# Altium PCB ArduhoopPCB.PcbDoc
Units mm, origin at the board's own origin, x right, y up, seen from the top; angles counter-clockwise.
Board outline 30 x 25.4 mm, 4 copper layers (L1, L2 (GND), L3, L4), stack 0.844 mm thick; 52 components, 41 nets, 229 pads, 70 vias.
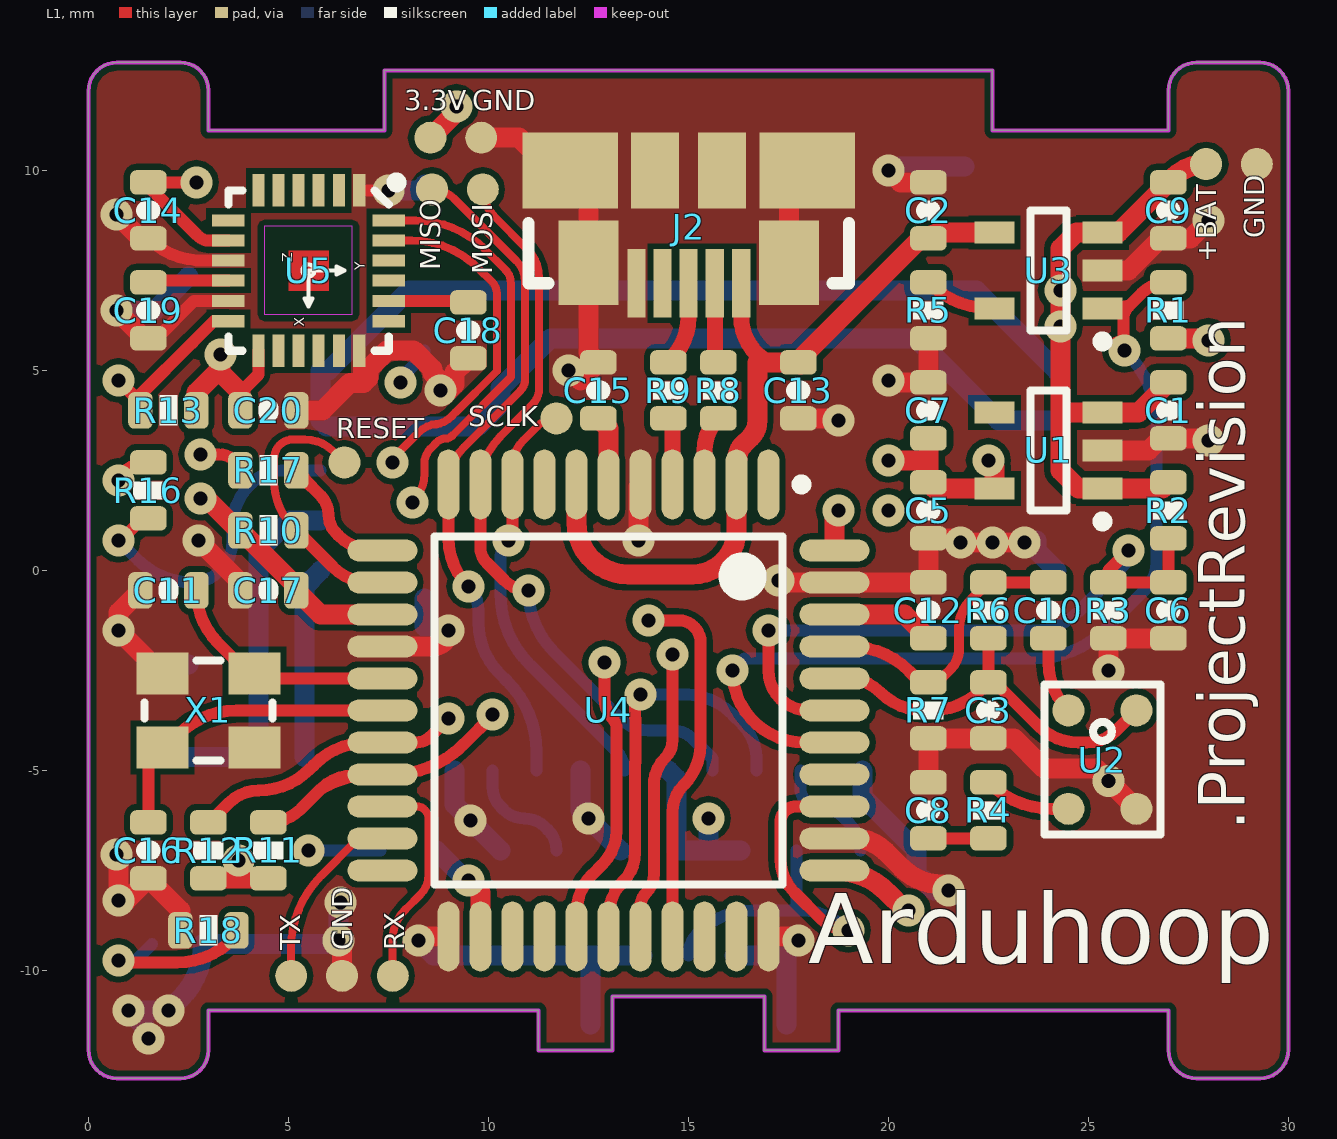
[diagram p0: L1 view]
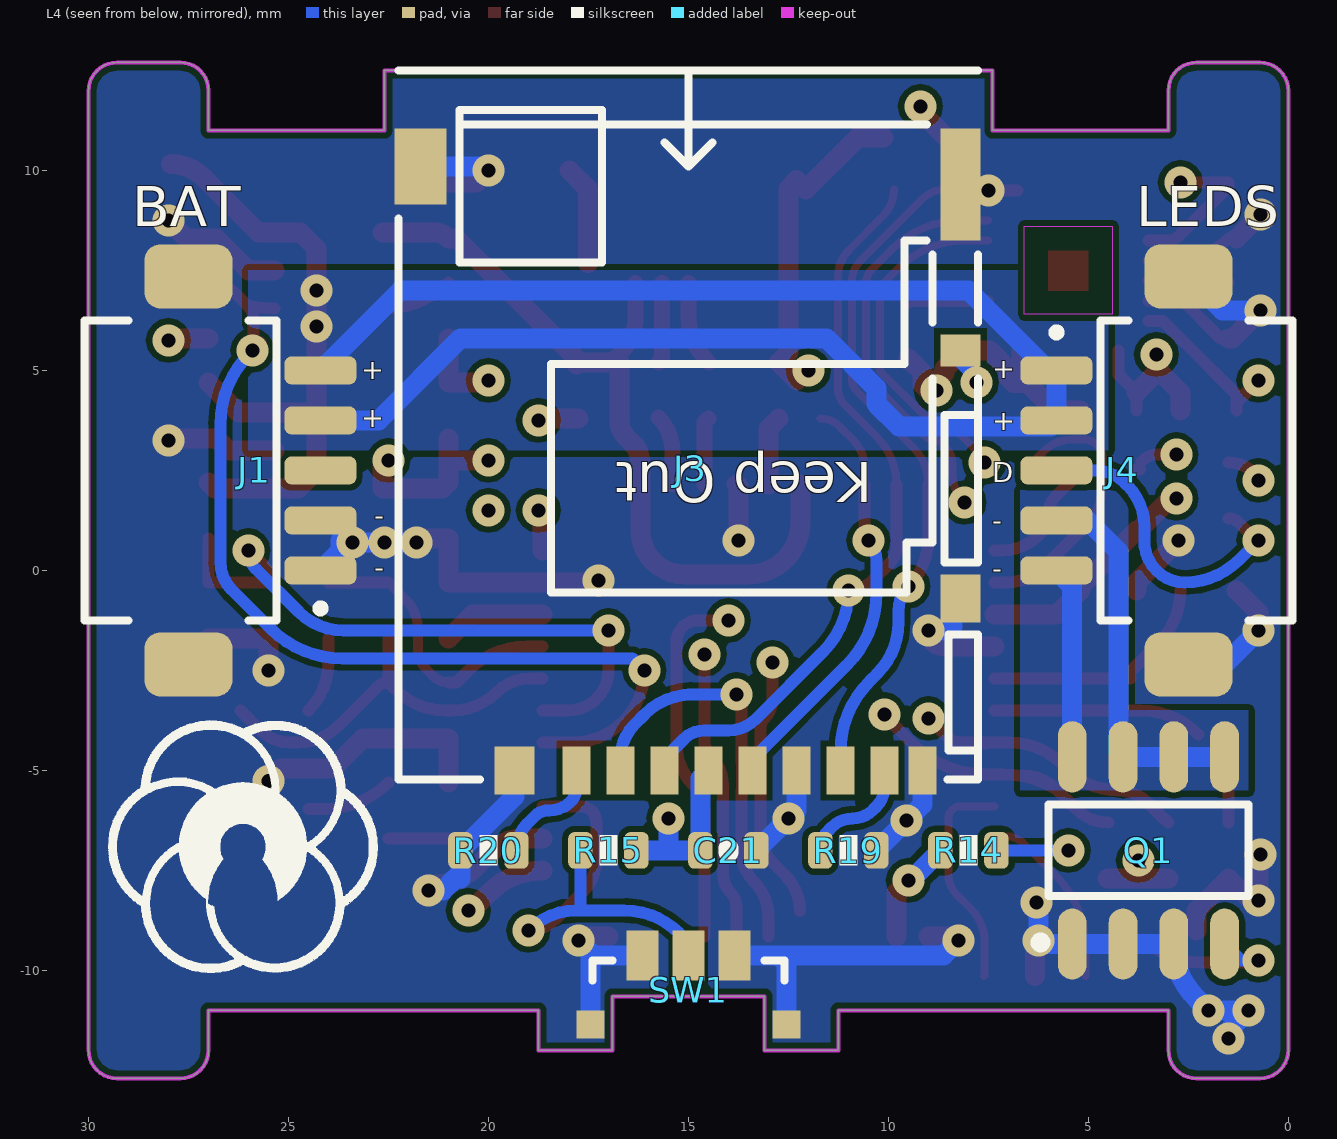
[diagram p1: L4 view, seen from below]
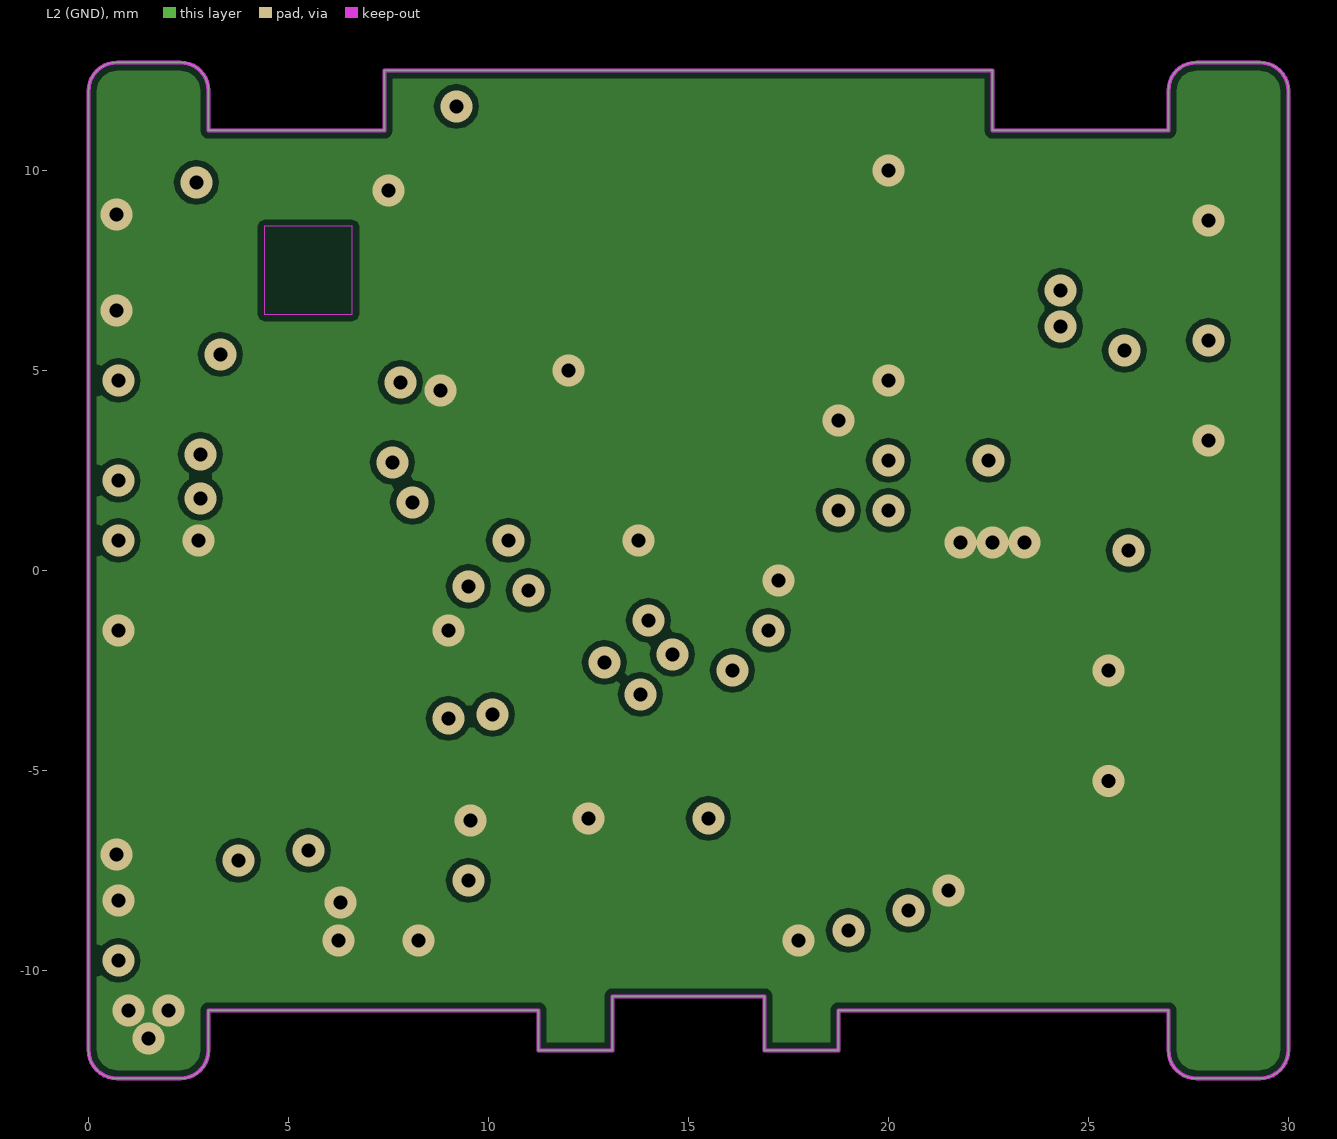
[diagram p2: L2 (GND)]
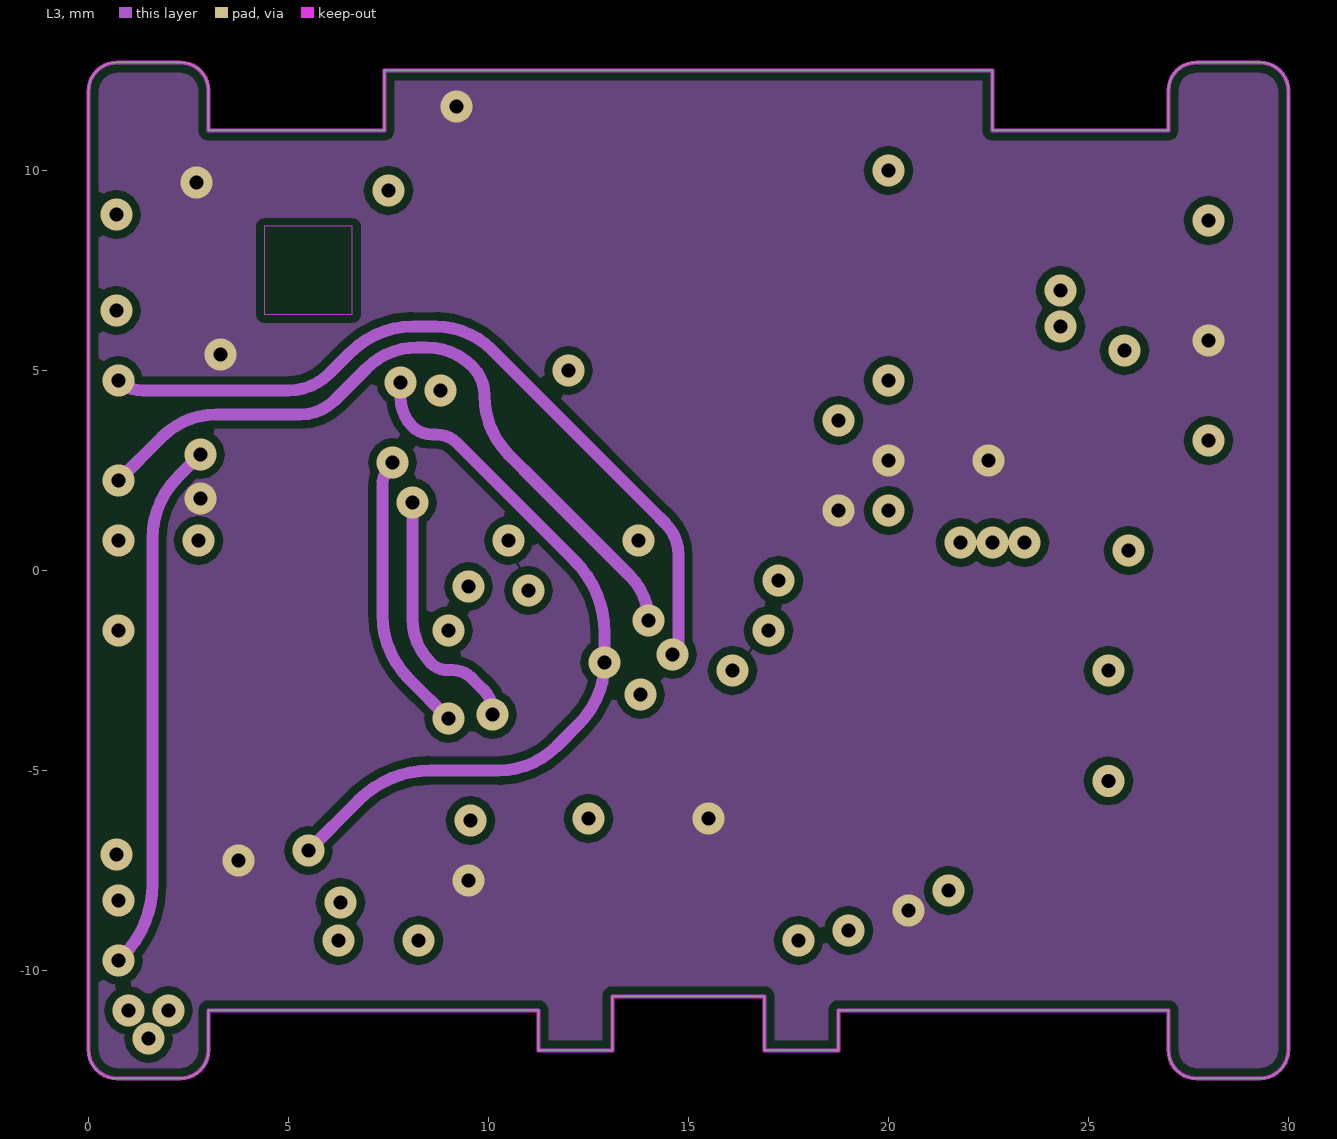
[diagram p3: L3]
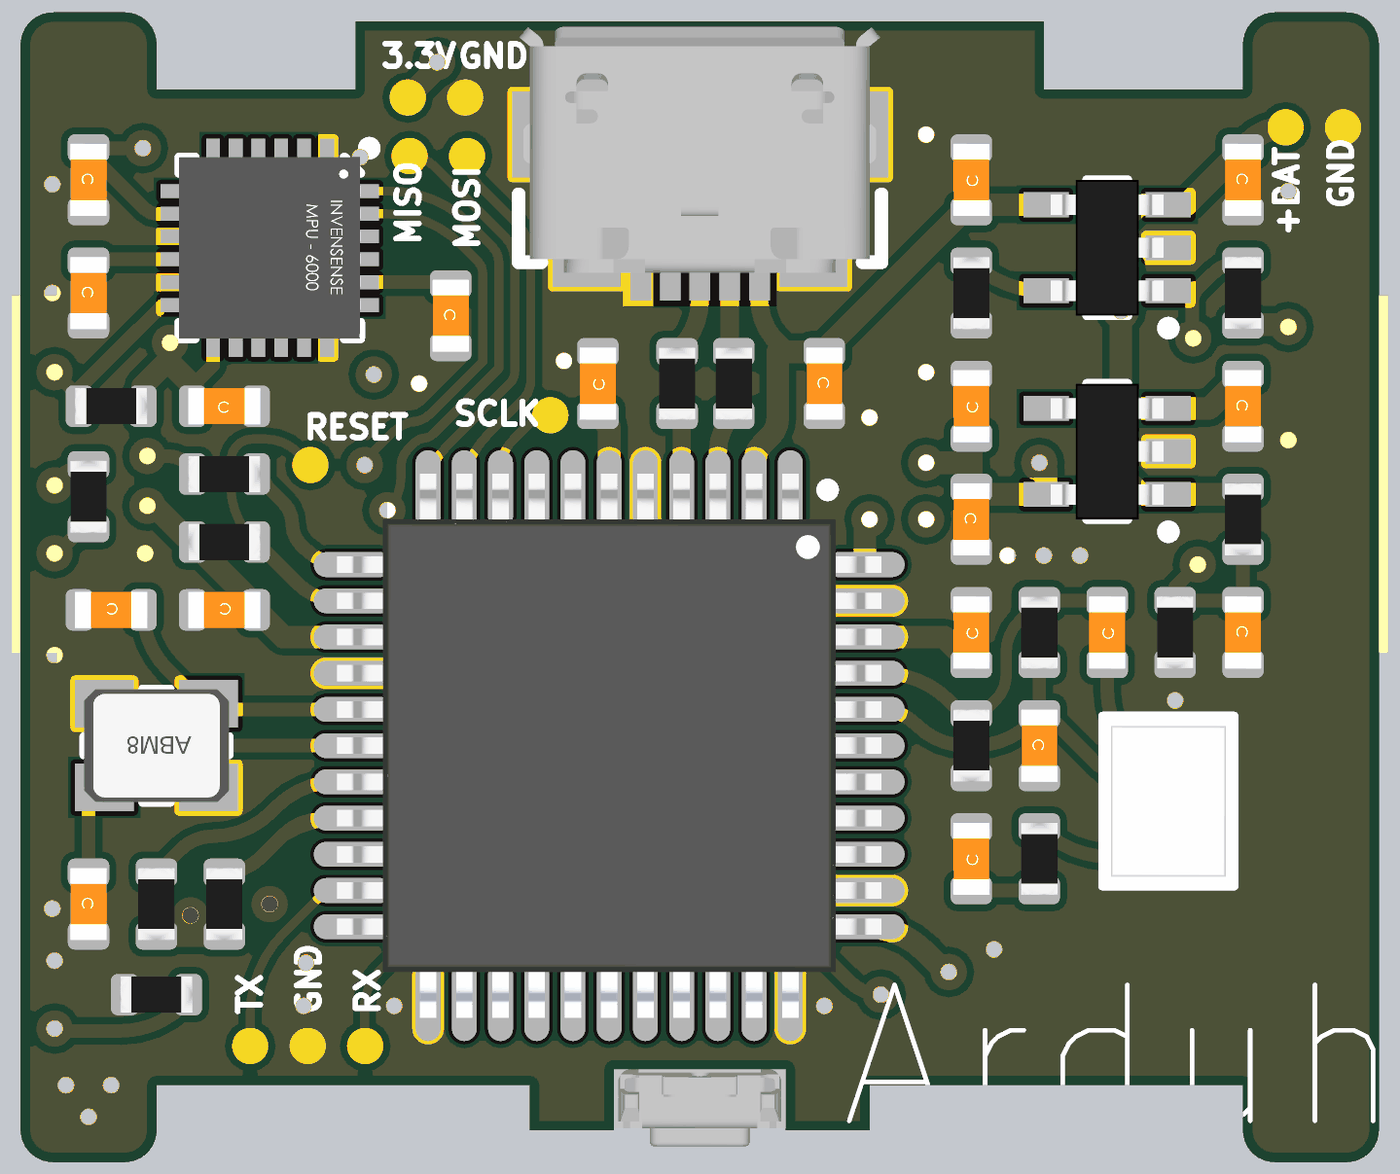
[diagram p4: 3D render of the assembled board from above, using the file's embedded part models]
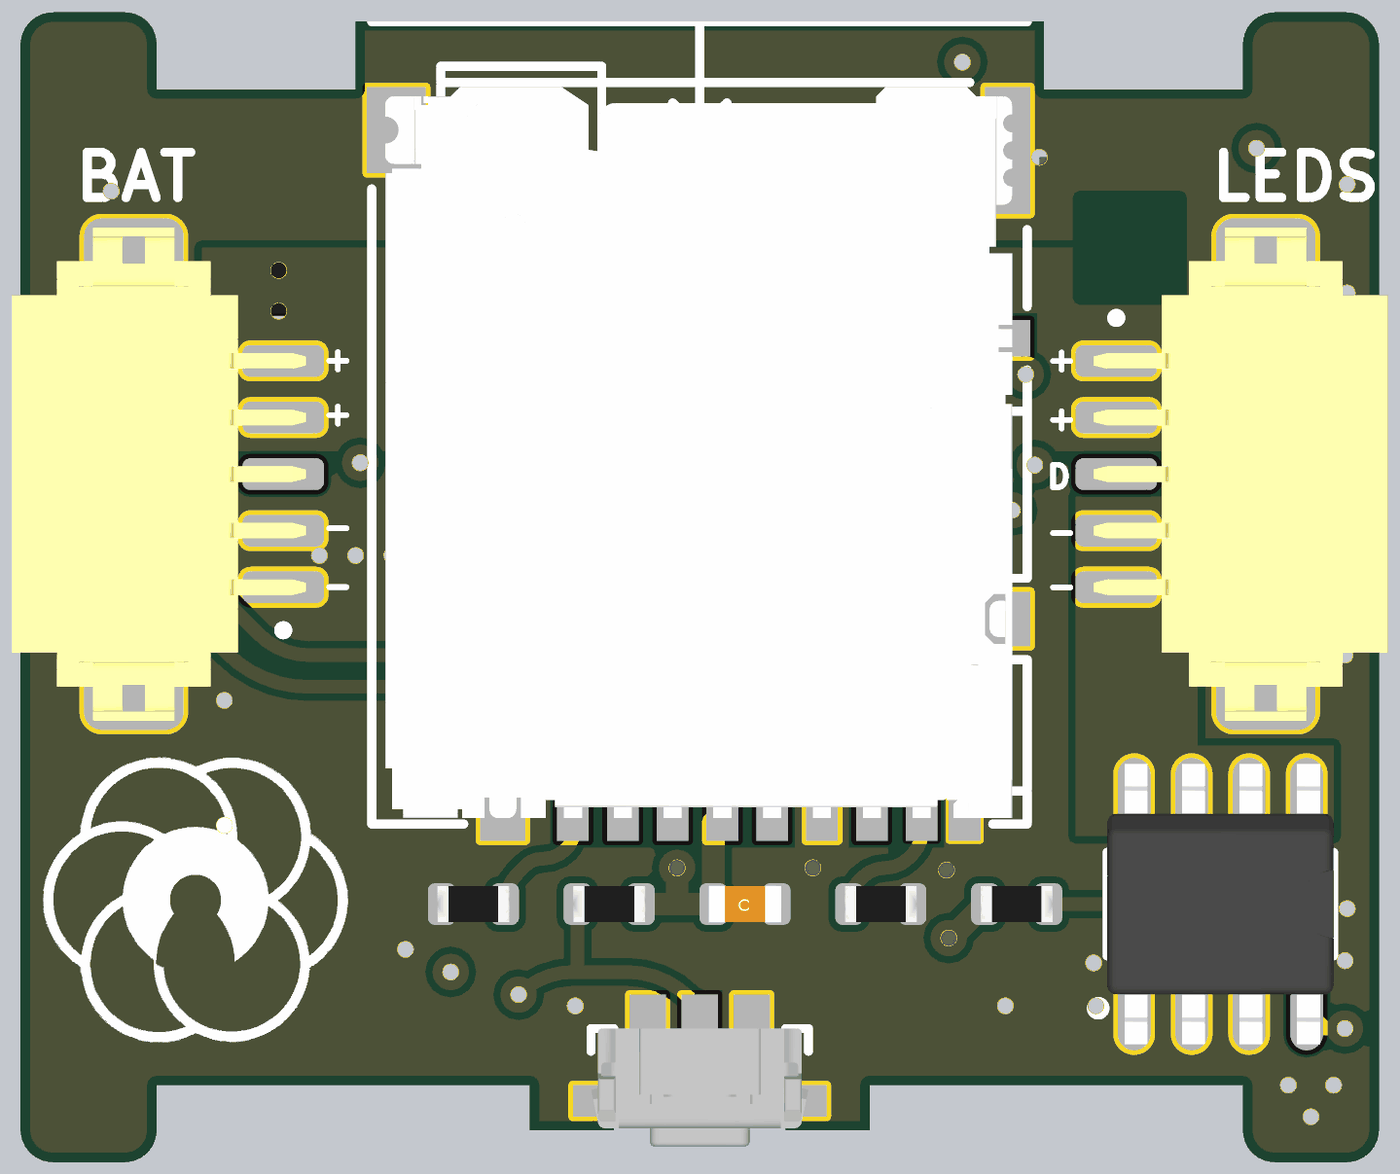
[diagram p5: 3D render of the assembled board from below, using the file's embedded part models]

## Layer stack, top to bottom
Top Solder: solder mask 0.0102, Solder Resist, Dk 3.5
L1: signal copper 0.0356
Dielectric 1: core 0.32, FR-4, Dk 4.8
L2 (GND): signal copper 0.036
Dielectric 3: prepreg 0.127, Dk 4.2
L3: signal copper 0.036
Dielectric 4: core 0.254, Dk 4.2
L4: signal copper 0.0356
Bottom Solder: solder mask 0.0102, Solder Resist, Dk 3.5

## Board outline
0,-11.985 ccw(c0.715,-11.985) 0.715,-12.7 2.3,-12.7 ccw(c2.3,-12) 3,-12 3,-11 11.25,-11 11.25,-12 13.1,-12 13.1,-10.65 16.9,-10.65 16.9,-12 18.75,-12 18.75,-11 27,-11 27,-12 ccw(c27.7,-12) 27.7,-12.7 29.285,-12.7 ccw(c29.285,-11.985) 30,-11.985 30,11.985 ccw(c29.285,11.985) 29.285,12.7 27.7,12.7 ccw(c27.7,12) 27,12 27,11 22.6,11 22.6,12.5 7.4,12.5 7.4,11 3,11 3,12 ccw(c2.3,12) 2.3,12.7 0.715,12.7 ccw(c0.715,11.985) 0,11.985

## Design rules (kind name [scope] priority, off if disabled: settings)
AssemblyTestPointUsage [InNetClass('TP')] p1:
AssemblyTestpoint [All] p1: testpointundercomponent=TRUE minsize=0.8 maxsize=0.8 preferedsize=0.8 minholesize=0 maxholesize=0 preferedholesize=0 testpointgrid=0.025 usegrid=FALSE gridtolerance=0 allowsidetop=TRUE minspacing=1.27
Clearance Clearance_Button [HasFootprint('EVPAEJB2A')] p1: gap=0.1
Clearance Clearance_L2L3 [OnLayer('L2 (GND)')   or OnLayer('L3')] p2: gap=0.203
Clearance [All] p3: gap=0.152
DiffPairsRouting [All] p1: maxlimit=0.254 minlimit=0.254 mostfreqgap=0.254 toplayer_minwidth=0.4 toplayer_maxwidth=0.4 toplayer_prefwidth=0.4 midlayer1_minwidth=0.4 midlayer1_maxwidth=0.4 midlayer1_prefwidth=0.4 midlayer2_minwidth=0.4 midlayer2_maxwidth=0.4 midlayer2_prefwidth=0.4 bottomlayer_minwidth=0.4 bottomlayer_maxwidth=0.4 bottomlayer_prefwidth=0.4 maxuncoupledlength=3
FabricationTestpoint [not All] p1: side=1 testpointundercomponent=TRUE minsize=0.1 maxsize=2.54 preferedsize=1.524 minholesize=0 maxholesize=1.016 preferedholesize=0.813 testpointgrid=0.025 allowsidetop=TRUE usegrid=FALSE gridtolerance=0
HoleSize [All] p1: absolutevalues=TRUE maxlimit=2.54 minlimit=0.33 maxpercent=80.000 minpercent=20.000
MinimumSolderMaskSliver [All] p1: minsoldermaskwidth=0.1
PlaneConnect [All] p1: planeconnectstyle=Direct reliefexpansion=0.508 reliefentries=4 reliefconductorwidth=0.254 reliefairgap=0.254
PolygonConnect [All] p1: connectstyle=Direct reliefconductorwidth=0.254 reliefentries=4 polygonreliefangle="90 Angle" airgapwidth=0.254
RoomDefinition Room_MPU6050 [HasFootprint('QFN24_4X4X0.9mm')] p1: confinementstyle=ConfineIn formatcopy=TRUE lockcomponents=FALSE outline 1,10.2 18.6,10.2 18.6,4.2 1,4.2
RoutingVias [All] p1: holewidth=0.35 width=0.8 viastyle="Through Hole" minholewidth=0.35 minwidth=0.8 maxholewidth=0.35 maxwidth=0.8
SilkToSilkClearance [All] p1: silktosilkclearance=0.152
SilkToSolderMaskClearance [IsPad] p1: minsilkscreentomaskgap=0.098 clearancetoexposedcopper=TRUE
SolderMaskExpansion [All] p1: expansion=0.102
Width Width_IMU6050 [TouchesRoom('Room_MPU6050') and (InNet('+3.3V')or InNet('+VBUS')or InNet('GND'))] p1: maxlimit=0.5 minlimit=0.3 preferedwidth=0.3
Width Width_PWR [InNet('+3.3V') or InNet('+BAT')or  InNet('+UCAP')or InNet('+AREF') or InNet('+VBUS') or InNet('GND') or InNet('LED_GND')] p2: maxlimit=0.5 minlimit=0.5 preferedwidth=0.5
Width [All] p3: maxlimit=0.3 minlimit=0.152 preferedwidth=0.3
21 further rules are at their usual default settings.

## Classes and differential pairs
net class SPI: CS MISO MOSI SCLK
net class USB: D_N D_P
net class AVR_SPI: +3.3V GND MISO MOSI RESET SCLK
net class TP: +3.3V +BAT GND MISO MOSI RESET RX SCLK TX
differential pair D1: +D1_P -D1_N
differential pair D: +D_P -D_N

## Components (designator, comment, footprint, x,y, rotation, side; value= is the part's Value field where it differs from the comment)
C1 "CAP" C0603 27,4 r270 top locked
C2 "CAP" C0603 21,9 r90 top locked
C3 "CAP" C0603 22.5,-3.5 r270 top locked
C5 "CAP" C0603 21,1.5 r270 top locked
C6 "CAP" C0603 27,-1 r270 top locked
C7 "CAP" C0603 21,4 r90 top locked
C8 "CAP" C0603 21,-6 r90 top locked
C9 "CAP" C0603 27,9 r270 top locked
C10 "CAP" C0603 24,-1 r90 top locked
C11 "CAP" C0603 2,-0.5 r180 top locked
C12 "CAP" C0603 21,-1 r90 top locked
C13 "CAP" C0603 17.75,4.5 r270 top
C14 "CAP" C0603 1.5,9 r270 top locked
C15 "CAP" C0603 12.75,4.5 r90 top locked
C16 "CAP" C0603 1.5,-7 r270 top locked
C17 "CAP" C0603 4.5,-0.5 r180 top locked
C18 "CAP" C0603 9.5,6 r270 top locked
C19 "CAP" C0603 1.5,6.5 r270 top locked
C20 "CAP" C0603 4.5,4 r0 top locked
C21 "CAP" C0603 14,-7 r180 bottom locked
J1 "HDR_TAB_1x5" DF13A-5P-1.25H 27.5,2.5 r90 bottom locked
J2 "Molex 47346-0001" "Molex 47346-0001" 15,10 r270 top locked
J3 "DM3AT-SF-PEJM5" USD_DM3AT 17.8,-5 r90 bottom locked
J4 "HDR_TAB_1x5" DF13A-5P-1.25H 2.5,2.5 r270 bottom locked
Q1 "MOSFET_N" SO-8 3.5,-7 r90 bottom locked
R1 "RES" R0603 27,6.5 r90 top locked
R2 "RES" R0603 27,1.5 r90 top locked
R3 "RES" R0603 25.5,-1 r90 top locked
R4 "RES" R0603 22.5,-6 r270 top locked
R5 "RES" R0603 21,6.5 r270 top locked
R6 "RES" R0603 22.5,-1 r270 top locked
R7 "RES" R0603 21,-3.5 r90 top locked
R8 "RES" R0603 15.75,4.5 r270 top
R9 "RES" R0603 14.5,4.5 r270 top
R10 "RES" R0603 4.5,1 r0 top locked
R11 "RES" R0603 4.5,-7 r90 top locked
R12 "RES" R0603 3,-7 r90 top locked
R13 "RES" R0603 2,4 r180 top locked
R14 "RES" R0603 8,-7 r0 bottom locked
R15 "RES" R0603 17,-7 r180 bottom locked
R16 "RES" R0603 1.5,2 r270 top locked
R17 "RES" R0603 4.5,2.5 r180 top locked
R18 "RES" R0603 3,-9 r180 top locked
R19 "RES" R0603 11,-7 r0 bottom locked
R20 "RES" R0603 20,-7 r180 bottom locked
SW1 "EVPAE" EVPAEJB2A 15,-10.25 r180 bottom locked
U1 "MIC5219" SOT-23-5 24,3 r180 top locked
U2 "SPU0414HR5H" SPU0414HR5H 24.5,-3.5 r0 top locked
U3 "MCP73832" SOT-23-5 24,7.5 r180 top locked
U4 "ATmega32U4-AU" ATMEL-TQFP44_ml 13,-3.5 r270 top locked
U5 "MPU6050" QFN24_4X4X0.9mm 5.5,7.5 r270 top locked
X1 "Crystal_4pin" SMD4_3.2x2.50mm_ABM8 3,-3.5 r180 top locked

## Footprints (in the part's own frame and the unit in brackets; to place one, negate y for a bottom-side part, rotate by r counter-clockwise, add the part's x,y. Pads: shape width x height; smd on the part's side, far side on the other; paste and mask are expansions set on the pad)
ATMEL-TQFP44_ml [mm] "Thin QFP, 44-Leads, Body 10x10mm, Pitch 0.8mm, IPC Medium Density"
  oval 1.75x0.55 smd paste+0 mask+0.075: 1(-5.65,4) 2(-5.65,3.2) 3(-5.65,2.4) 4(-5.65,1.6) 5(-5.65,0.8) 6(-5.65,0) 7(-5.65,-0.8) 8(-5.65,-1.6) 9(-5.65,-2.4) 10(-5.65,-3.2) 11(-5.65,-4) 23(5.65,-4) 24(5.65,-3.2) 25(5.65,-2.4) 26(5.65,-1.6) 27(5.65,-0.8) 28(5.65,0) 29(5.65,0.8) 30(5.65,1.6) 31(5.65,2.4) 32(5.65,3.2) 33(5.65,4)
  oval 0.55x1.75 smd paste+0 mask+0.075: 12(-4,-5.65) 13(-3.2,-5.65) 14(-2.4,-5.65) 15(-1.6,-5.65) 16(-0.8,-5.65) 17(0,-5.65) 18(0.8,-5.65) 19(1.6,-5.65) 20(2.4,-5.65) 21(3.2,-5.65) 22(4,-5.65) 34(4,5.65) 35(3.2,5.65) 36(2.4,5.65) 37(1.6,5.65) 38(0.8,5.65) 39(0,5.65) 40(-0.8,5.65) 41(-1.6,5.65) 42(-2.4,5.65) 43(-3.2,5.65) 44(-4,5.65)
  silkscreen extent -5.77,-4.35 4.35,4.95, body extent -6.01,-6.01 6.01,6.01, height 1.35
C0603 [mil]
  rrect50% 24x36 smd mask+0: 1(-27.56,0) 2(27.56,0)
  silkscreen extent 0,-2 0,2, body extent -31,-16 32,16, height 34
DF13A-5P-1.25H [mm]
  rrect50% 0.7x1.8 smd paste+0: 1(-2.5,-3.3) 2(-1.25,-3.3) 3(0,-3.3) 4(1.25,-3.3) 5(2.5,-3.3)
  rrect50% 1.6x2.2 smd: TAB(-4.85,0) TAB(4.85,0)
  silkscreen extent -3.75,-3.4 3.75,2.6, body extent -5.45,-3.8 5.45,2.7, height 3.6
EVPAEJB2A [mm]
  rect 0.7x0.7 smd: 0(-2.45,-1.1) 0(2.45,-1.1)
  rect 0.8x1.25 smd: 1(-1.15,0.625) 2(0,0.625) 3(1.15,0.625)
  silkscreen extent -2.4,0 2.4,0.5, body extent -2.4,-2.1 2.4,0.5, height 0.95
"Molex 47346-0001" [mil]
  rect 67x18 smd: D+(111,0) D-(111,26) GND(111,-51.18) ID(111,-25.59) VBUS(111,52)
  rect 75x94 smd: GND1(0,117) GND4(0,-116.14)
  rect 83x59 smd: GND2(91,99) GND3(91,-98.43)
  rect 75x47 smd: GND5(0,-32.97) GND6(0,33)
  silkscreen extent 52,-157 111,158, body extent -94,-157 120,157, height 107
QFN24_4X4X0.9mm [mil] "QFN, 24-Leads, Body 3.00x3.00mm, Pitch 0.40mm, Thermal Pad 1.54x1.70mm, IPC High Density"
  rect 32x12 smd: 1(-78.74,50) 2(-78.74,30) 3(-78.74,10) 4(-78.74,-9.84) 5(-78.74,-29.53) 6(-78.74,-49.21) 13(79,-49.21) 14(79,-29.53) 15(79,-9.84) 16(79,10) 17(79,30) 18(79,50)
  rect 12x32 smd: 7(-49.21,-78.74) 8(-29.53,-78.74) 9(-9.84,-78.74) 10(10,-78.74) 11(30,-78.74) 12(50,-78.74) 19(50,79) 20(30,79) 21(10,79) 22(-9.84,79) 23(-29.53,79) 24(-49.21,79)
  L1 region: -19.69,-19.68 20,-19.68 20,20 -19.69,20
  Keep-Out Layer region: -43.3,-43.31 43.31,-43.31 43.31,43.31 -43.3,43.31
  silkscreen extent -92,-79 79,92, body extent -79,-79 79,79, height 35
R0603 [mil]
  rrect50% 24x36 smd mask+0: 1(-27.56,0) 2(27.56,0)
  silkscreen extent -9,-15 9,15, body extent -31,-16 32,16, height 18
SMD4_3.2x2.50mm_ABM8 [mm]
  rect 1.3x1.05 smd: 1(-1.15,-0.925) 2(1.15,-0.925) 3(1.15,0.925) 4(-1.15,0.925)
  silkscreen extent -1.6,-1.25 1.6,1.25, body extent -1.6,-1.24 1.6,1.24, height 0.8
SO-8 [mm] "SOIC, 8-Leads, Body 4.90x3.90mm, Pitch 1.27mm, IPC Medium Density"
  oval 1.78x0.72 smd: 1(-2.34,1.905) 2(-2.34,0.635) 3(-2.34,-0.635) 4(-2.34,-1.905) 5(2.34,-1.905) 6(2.34,-0.635) 7(2.34,0.635) 8(2.34,1.905)
  silkscreen extent -2.42,-2.5 1.14,2.83, body extent -3.1,-2.5 3.1,2.5, height 1.75
SOT-23-5 [mm] "SOT23, 5-Leads, Body 2.92x2.80mm, Pitch 0.95mm, IPC Medium Density"
  rect 1x0.55 smd paste+0: 1(-1.35,0.95) 2(-1.35,0) 3(-1.35,-0.95) 4(1.35,-0.95) 5(1.35,0.95)
  silkscreen extent -1.48,-1.5 0.45,1.9, body extent -1.25,-1.5 1.25,1.5, height 1.1
SPU0414HR5H [mm]
  round 0.8 smd paste+0: 1(1.7,0) 2(1.7,-2.46) 3(0,-2.46) 4(0,0)
  silkscreen extent -0.6,-3.1 2.3,0.65, body extent -0.62,-3.11 2.33,0.65, height 1.1
USD_DM3AT [mm]
  rect 1.2x0.7 smd: 1(0,0) 2(0,-1.1) 3(0,-2.2) 4(0,-3.3) 5(0,-4.4) 6(0,-5.5) 7(0,-6.6)
  rect 1.2x0.7 smd mask+0.07: 8(0,-7.7) 9(0,-8.65)
  rect 1.2x1 smd: 10(4.3,-9.6) 14(0,1.55)
  rect 0.8x1 smd: 11(10.5,-9.6)
  rect 2.8x1 smd: 12(14.65,-9.6)
  rect 1.9x1.3 smd: 13(15.1,3.9)
  silkscreen extent -0.23,-10.03 17.49,4.44, body extent -0.1,-9.7 16.05,4.15, height 1.68

## Part data
C1 C5 C9 C13 C15: library part C01293, "CAP CER 1UF 16V X7R 0603"
C2 C3 C6 C7 C8 C10 C12 C14 C17 C19 C20 C21: library part C01052, "CAP CER 0.1UF 16V X7R 0603"
C11 C16: library part C00144, "CAP CER 22PF 50V NP0 0603"
C18: library part C00648, "CAP CER 2200PF 50V X7R 0603"
J1 J4: library part J00022, "CONN HEADER 5POS 1.25MM R/A TIN"
J2: library part USB
J3: library part J00167, "CONN MICRO SD CARD PUSH-PUSH R/A"
Q1: library part Q000008, "MOSFET P-CH 30V 5.8A 8-SOIC"
R1 R5 R10 R11 R12 R13 R18: library part R00109, "RES SMD 2.2K OHM 1% 1/10W 0603"
R2 R3 R6 R7 R14 R15 R19 R20: library part R00189, "RES SMD 100K OHM 1% 1/10W 0603"
R4 R8 R9 R16 R17: library part R00015, "RES SMD 22 OHM 1% 1/10W 0603"
SW1: library part SW000001, "SWITCH TACTILE SPST-NO 0.02A 15V"
U1: library part PMIC000001, "IC REG LDO 3.3V 0.5A SOT23-5"
U2: library part P000005, "MIC MEMS ANALOG OMNI -22DB"
U3: library part P000002, "IC LI-ION/LI-POLY CTRLR SOT23-5"
U4: library part MCU00751, "IC MCU 8BIT 32KB FLASH 44TQFP"
U5: library part P000004, "GYRO/ACCELEROMETER 6AXIS 24QFN"
X1: library part Q00342, "CRYSTAL 16.0000MHZ 18PF SMD"

## Free pads (board coordinates)
  round 0.8 smd paste-1 mask+0: TP(5.07,-10.135) TP(6.34,-10.135) TP(6.4,2.7) TP(7.61,-10.135) TP(8.55,10.82) TP(8.59,9.525) TP(9.82,10.82) TP(9.86,9.525) TP(11.7,3.8) TP(27.94,10.16) TP(29.21,10.16)

## Via types
v1: diameter 0.8, hole 0.35, L1 to L4, tented both sides, 70 vias

## Nets (pads, with @x,y where several pads share a name; then routed paths per layer and width w, separated by ;. In a path a pad name is that pad's centre, name@x,y a point inside that pad or via, vN(x,y) a via of type N, cw(c..) or ccw(c..) an arc to the next point about the centre after c; other vN are vias at no path point)
+3.3V: C5.1 C7.1 C14.1 C17.1 C20.1 C21.1 J3.4 pad.TP@8.55,10.82 R1.1 R10.1 R11.1 R12.1 R13.1 R14.2 R15.2 U1.5 U4.14 U4.24 U4.34 U4.44 U5.8 U5.13 | length 33.2
  L1 w0.3: v1(2.7,9.7) C14.1 1.5,9.6 2.714,8.386 ccw(c2.92,8.591) 2.77,8.342 ccw(c2.992,8.564) 2.992,8.25 U5.8 ; C20.1 3.8,4.45 4.25,4.9 U5.13
  L1 w0.5: R13.1 2.7,4.45 3.3,5.05 v1(3.3,5.4) 3.3,4.95 C20.1@3.8,4.45 ; v1(2.8,1.8) 2.95,1.8 3.75,1 R10.1 5.2,-0.4 C17.1 5.8,-1.1 U4.14 ; R12.1 R11.1 R11.1@4.525,-7.7 ; 3.75,-7.7 v1(3.75,-7.25) ; pad.TP@8.55,10.82 9.2,11.47 v1@9.2,11.5 ; v1(9.2,11.6) v1@9.2,11.5 ; v1@9.3,11.6 v1@9.2,11.5 ; v1(9.5,-7.75) 9.8,-8.05 U4.24 ; U4.34 cw(c18.65,-9.371) 19.973,-8.048 v1@20.375,-8.45 ; U4.44 18.65,1.4 v1(18.75,1.5) ; v1(20,2.75) 21,2.75 ; v1@20.413,-8.413 v1(20.5,-8.5) ; C7.1 21,2.75 ; v1(22.5,2.75) 22.65,2.6 U1.5 21.15,2.05 C5.1 21,2.75 ; R1.1 27.95,5.8 v1(28,5.75)
  L4 w0.5: R14.2 9.45,-7.75 v1(9.5,-7.75) ; J3.4 14.7,-5.2 C21.1 15.5,-7 ; v1(15.5,-6.2) 15.5,-7 ; R15.2 15.5,-7
+3.3V_AUDIO: C3.1 R6.2 U2.1 U4.40 | length 9.9
  L1 w0.3: U4.40 18.955,-2.7 cw(c18.955,-3.895) 19.8,-3.05 ; 19.8,-3.05 ccw(c20.886,-1.964) 20.886,-3.5 21.075,-3.5 ccw(c21.075,-1.75) C3.1@22.312,-2.988 ; C3.1@22.313,-2.987 C3.1 ; R6.2 C3.1 ; U2.1 25.714,-3.986 cw(c24.95,-3.222) 24.95,-4.302 24.747,-4.302 cw(c24.747,-2.903) 23.758,-3.893 22.782,-2.917 ccw(c22.5,-3.199) C3.1
+AREF: C12.1 U4.42 | length 2.6
  L1 w0.5: U4.42 20.4,-1.1 C12.1
+BAT: C1.1 C9.1 J1.4 J1.5 J4.1 J4.2 pad.TP@27.94,10.16 R2.2 U1.1 U1.3 U3.3 | length 57.8
  L1 w0.5: R2.2 26.85,2.05 U1.1 24.75,2.05 24.3,2.5 24.3,4 ; C1.1 26.25,3.95 U1.3 24.35,3.95 24.3,4 ; pad.TP@27.94,10.16 ccw(c27.94,9.001) 27.121,9.821 C9.1 25.75,8.45 U3.3 24.7,8.45 24.3,8.05 24.3,4
  L4 w0.5: J1.4 22.75,3.75 20.698,5.802 11.55,5.802 10.302,4.555 10.302,4.168 9.732,3.598 5.952,3.598 J4.2 J4.1 6,5 8,7 22.2,7 J1.5
  other v1: 24.3,6.1 24.3,7
+UCAP: C15.1 U4.6 | length 1.8
  L1 w0.5: C15.1 13,3.55 U4.6
+VBUS: C2.1 C13.1 J2.VBUS U3.4 U4.2 U4.7 | length 21.1
  L1 w0.4: J2.VBUS 16.321,6.34 ccw(c17.615,6.34) 16.332,6.168 ccw(c17.615,6.34) 17.01,5.196
  L1 w0.5: U4.7 12.2,1.2 ccw(c13.5,1.2) 12.247,0.853 ccw(c13.5,1.2) 13.153,-0.053 ccw(c13.5,1.2) 13.5,-0.1 15.1,-0.1 ccw(c15.1,1) 16.2,1 U4.2 16.2,2.74 cw(c16.285,2.74) 16.225,2.8 cw(c16.708,2.8) 16.366,3.141 16.55,3.325 ccw(c16.128,3.747) 16.725,3.747 16.725,5.2 ; 16.75,5.2 17.679,5.2 cw(c17.679,5.029) C13.1@17.8,5.15 ; 16.95,5.2 C13.1@17.7,5.2 ; C13.1 C13.1@17.7,5.2 ; U3.4 21.362,8.45 ccw(c21.362,7.938) C2.1 20.8,8.3 C13.1@17.7,5.2
AUDIO: C10.2 R6.1 R7.2 U4.41 | length 7.3
  L1 w0.25: R7.2 ccw(c21,-2.257) 21.384,-2.641 21.55,-2.475 ccw(c21.03,-1.955) 21.761,-2.04 ccw(c21.03,-1.955) 21.765,-1.955 21.765,-1.45 cw(c22.768,-1.45) 22.059,-0.741 R6.1
  L1 w0.3: U4.41 19.034,-1.9 cw(c19.034,-3.991) 20.512,-2.512 ; 20.513,-2.513 20.8,-2.8 R7.2 ; R6.1 C10.2
BAT_SENSE: C6.1 R2.1 R3.2 U4.39 | length 16.7
  L1 w0.3: v1(17,-1.5) 17,-2.5 ccw(c18,-2.5) 18,-3.5 U4.39 ; v1(26,0.5) 25.5,0 R3.2 C6.1 R2.1
  L4 w0.3: v1(17,-1.5) 23.621,-1.5 ccw(c23.621,0.079) 24.738,-1.038 25.805,0.03 ccw(c25.336,0.5) 25.901,0.151 ccw(c25.336,0.5) v1(26,0.5)
BAT_STAT: R1.2 U3.1 U4.38 | length 24.2
  L1 w0.3: v1(16.1,-2.5) ccw(c17.9,-2.5) 17.9,-4.3 U4.38 ; U3.1 25.431,6.55 ccw(c25.431,8.769) 26.033,6.633 ; v1@25.704,5.696 v1(25.9,5.5) ; v1@25.875,5.525 25.875,6.298 cw(c26.302,6.298) 26,6.6 26.033,6.633 ; R1.2 ccw(c27,6.234) 26.317,6.917 26.033,6.633
  L4 w0.3: v1(16.1,-2.5) 16.398,-2.202 17.291,-2.202 17.293,-2.2 23.648,-2.2 ccw(c23.648,0.34) 25.444,-1.456 26.415,-0.485 ccw(c25.721,0.209) 26.702,0.209 26.702,3.645 ccw(c24.162,3.645) 25.958,5.442 v1(25.9,5.5)
CS: J3.2 U4.28 | length 10.3
  L1 w0.3: U4.28 13,-8.663 cw(c14.263,-8.663) 13.369,-7.77 ccw(c12.68,-7.081) 13.371,-7.769 ccw(c12.651,-7.049) 13.669,-7.049 13.669,-5.496 13.665,-5.492 13.665,-4.804 13.671,-4.799 13.671,-3.697 13.669,-3.695 13.669,-3.416 cw(c14.116,-3.416) v1(13.8,-3.1)
  L4 w0.3: v1(13.8,-3.1) 14.893,-3.1 cw(c14.893,-4.807) 15.114,-3.114 cw(c14.893,-4.807) 16.1,-3.6 16.346,-3.846 cw(c15.493,-4.7) 16.7,-4.7 J3.2
D1_N: J2.D- R8.1 | length 2
  L1 w0.4: J2.D- 15.66,5.29 R8.1
D1_P: J2.D+ R9.1 | length 2.1
  L1 w0.4: R9.1 R9.1@14.587,5.288 ; R9.1@14.575,5.3 ccw(c13.549,6.326) 15,6.326 J2.D+
D_N: R8.2 U4.3 | length 1.8
  L1 w0.4: U4.3 15.4,2.98 cw(c16.595,2.98) 15.618,3.668 cw(c16.595,2.98) R8.2@15.75,3.825
D_P: R9.2 U4.4 | length 1.7
  L1 w0.4: R9.2 14.6,3.7 U4.4
DAT0: J3.1 R20.2 | length 2.8
  L4 w0.3: J3.1 17.8,-5.431 ccw(c18.294,-5.431) 17.945,-5.78 ccw(c18.475,-5.25) 18.475,-6 18.5,-6 cw(c18.5,-6.483) 18.841,-6.141 19.017,-6.317 cw(c18.334,-7) R20.2
DAT1: J3.8 R19.2 | length 2.9
  L4 w0.3: J3.8 10.1,-5.417 ccw(c10.783,-5.417) 10.3,-5.9 10.388,-5.988 ccw(c10.9,-5.476) 10.9,-6.2 cw(c10.9,-6.924) 11.412,-6.412 11.5,-6.5 cw(c11.017,-6.983) 11.7,-6.983 R19.2
GATE: Q1.4 R17.2 R18.1 | length 18.3
  L1 w0.3: v1(0.75,-9.75) ccw(c0.871,-9.629) 0.76,-9.76 ccw(c0.871,-9.629) 0.871,-9.8 2.212,-9.8 ccw(c2.212,-7.837) 2.652,-9.75 ccw(c2.212,-7.837) 3.126,-9.574 ccw(c2.212,-7.837) R18.1@3.6,-9.225 ; v1(2.8,2.9) 3.253,2.9 cw(c3.253,2.303) R17.2@3.675,2.725 ; R17.2@3.705,2.525 R17.2@3.8,2.525
  L3 w0.3: v1(0.75,-9.75) 0.856,-9.644 ccw(c-0.94,-7.848) 1.6,-7.848 1.6,0.8 cw(c3.773,0.8) 2.236,2.336 v1(2.8,2.9)
  L4 w0.3: v1(0.75,-9.75) 1.185,-9.75 Q1.4
GND: C1.2 C2.2 C3.2 C5.2 C6.2 C7.2 C8.2 C9.2 C11.2 C12.2 C13.2 C14.2 C15.2 C16.2 C17.2 C18.2 C19.2 C20.2 C21.2 J1.1 J1.2 J1.TAB J2.GND J2.GND1 J2.GND2 J2.GND3 J2.GND4 J2.GND5 J2.GND6 J3.6 J3.9 J3.10 J3.12 J3.13 J3.14 J4.TAB pad.TP@6.34,-10.135 pad.TP@9.82,10.82 pad.TP@29.21,10.16 Q1.1 Q1.2 Q1.3 R3.1 R5.2 R7.1 R18.2 R19.1 R20.1 SW1.0 SW1.1 SW1.3 U1.2 U2.2 U3.2 U4.5 U4.15 U4.23 U4.33 U4.35 U4.43 U5.1 U5.9 U5.11 U5.18 X1.2 X1.4 | length 108.8
  L1 w0.3: C14.2@1.3,8.3 C14.2 ccw(c2.828,9.628) 2.706,7.754 ccw(c2.828,9.628) 2.828,7.75 U5.9 ; C19.2@1.7,5.8 2.638,6.738 U5.11 ; 6.77,4.685 U5.18 ; U5.1 v1(7.5,9.5)
  L1 w0.5: v1(0.7,-7.1) cw(c0.579,-7.221) 0.75,-7.221 v1(0.75,-8.25) 0.95,-8.25 C16.2 2.3,-8.5 R18.2 ; v1(0.7,6.5) 1.4,5.8 C19.2 ; v1(0.7,8.9) C14.2@1.3,8.3 ; C11.2 0.75,-1.05 v1(0.75,-1.5) 1.825,-2.575 X1.2 ; v1(2.75,0.75) 3.8,-0.3 C17.2 ; C20.2 5.85,4 6.535,4.685 6.77,4.685 6.874,4.685 6.998,4.809 6.998,5.032 7.468,5.502 8.132,5.502 8.602,5.032 8.602,4.932 9,4.535 8.965,4.5 v1(8.8,4.5) 9,4.5 9.15,4.65 9.15,4.951 9.444,5.245 9.5,5.245 C18.2 ; v1(6.25,-9.25) 6.34,-9.34 pad.TP@6.34,-10.135 ; U4.15 8.6,-1.9 ccw(c8.6,-1.5) v1(9,-1.5) ; v1(8.25,-9.25) 8.35,-9.15 U4.23 ; pad.TP@10.12,10.82 10.77,10.82 J2.GND4@12.065,9.525 ; v1(12,5) 12.05,5 12.3,4.75 C15.2 12.5,5.45 J2.GND3 12.5,9.55 J2.GND4@12.295,9.755 ; v1(13.75,0.75) 13.75,2.1 U4.5 ; U4.33 17.65,-9.15 v1(17.75,-9.25) ; v1(17.25,-0.25) 17.3,-0.3 U4.43 C12.2 C5.2 21.559,0.8 cw(c21.559,0.459) v1(21.8,0.7) v1(22.6,0.7) v1(23.4,0.7) ; J2.GND2 17.515,9.543 J2.GND1 ; C13.2 18.7,3.8 v1(18.75,3.75) ; U4.35 19.14,-6.7 cw(c19.14,-7.81) 19.925,-7.025 20.326,-7.426 ccw(c21.35,-6.401) 20.489,-7.566 ccw(c21.35,-6.401) 20.703,-7.698 ccw(c21.35,-6.401) 21.35,-7.85 v1(21.5,-8) ; v1(20,4.75) 20.05,4.7 C7.2 R5.2 ; v1(20,10) 20.3,9.7 C2.2 ; C8.2 R7.1 C3.2 23.143,-4.2 23.897,-4.955 25.195,-4.955 U2.2 ; U1.2 26.5,3 26.8,3.3 C1.2 27.95,3.3 v1(28,3.25) ; U3.2 26,7.5 26.8,8.3 C9.2 27.55,8.3 v1(28,8.75) ; v1(25.5,-2.5) R3.1 C6.2
  L4 w0.5: v1(0.7,6.5) 1.65,6.5 J4.TAB@2.5,7.35 ; v1(0.75,-1.5) 1.6,-2.35 J4.TAB@2.5,-2.35 ; v1(1.5,-11.7) ccw(c1.017,-11.7) 1.359,-11.359 v1(1,-11) v1(2,-11) 2.303,-10.697 ccw(c0.946,-9.34) Q1.3 Q1.2 Q1.1 6.16,-9.34 v1(6.25,-9.25) 6.25,-8.421 cw(c6.421,-8.421) v1(6.3,-8.3) ; v1(7.5,9.5) 8.25,9.5 J3.12@8.4,9.65 ; v1(8.25,-9.25) 8.625,-9.625 12.75,-9.625 ; J3.10@8.4,-0.7 8.4,-1.4 8.5,-1.5 v1(9,-1.5) ; J3.9 9.15,-5.85 v1(9.55,-6.25) R19.1 ; J3.6 12.3,-6 v1(12.5,-6.2) C21.2 ; SW1.0@12.55,-11.35 12.55,-9.825 12.75,-9.625 ; SW1.3 12.75,-9.625 ; SW1.1 17.375,-9.625 17.45,-9.55 SW1.0@17.45,-11.35 ; J3.14 19.35,-5.65 R20.1 20.7,-7.698 20.832,-7.698 21.135,-8 v1(21.5,-8) ; v1(20,10) 20.1,10.1 J3.13@21.9,10.1 ; v1(21.8,0.7) v1(22.6,0.7) v1(23.4,0.7) 23.65,0.7 23.7,0.75 23.7,0.5 J1.1
  other v1: 25.5,-5.26
LED_DATA: R16.1 U4.30 | length 28.2
  L1 w0.3: v1@0.7,2.275 0.86,2.435 cw(c1.5,1.795) R16.1 ; v1(14,-1.25) 14.764,-1.25 cw(c14.764,-1.789) 15.302,-1.789 15.302,-4.351 cw(c13.878,-4.351) 15.07,-5.131 cw(c13.878,-4.351) 14.885,-5.358 ccw(c15.574,-6.046) 14.6,-6.046 U4.30
  L3 w0.3: v1(0.75,2.25) 1.834,3.334 cw(c3.2,1.969) 3.2,3.9 5.305,3.9 ccw(c5.305,5.095) 6.15,4.25 6.95,5.05 cw(c8.225,3.774) 8.225,5.578 8.446,5.578 cw(c8.446,3.946) 9.6,5.1 cw(c8.876,4.376) 9.9,4.376 ccw(c12.014,4.376) 10.519,2.881 ; 10.519,2.881 11.2,2.2 13.54,-0.14 cw(c12.431,-1.25) v1(14,-1.25)
LED_DATA_O: J4.3 R16.2 | length 8.1
  L1 w0.3: v1@0.775,0.725 R16.2@1.244,1.194 ; R16.2@1.244,1.194 cw(c1.5,0.938) R16.2
  L4 w0.3: v1(0.75,0.75) 1.234,0.266 ccw(c2.6,1.631) 2.6,-0.3 ccw(c2.6,0.666) 3.283,-0.017 3.3,0 ccw(c2.576,0.724) 3.592,0.599 ccw(c2.576,0.724) 3.6,0.724 3.6,1.1 cw(c5.049,1.1) 4.024,2.124 ; 4.024,2.124 4.1,2.2 cw(c4.824,1.476) 4.824,2.5 J4.3
LED_GND: J4.4 J4.5 Q1.5 Q1.6 Q1.7 Q1.8 | length 14.4
  L4 w0.5: Q1.5 Q1.6 Q1.7 4.25,-4.545 4.25,0.475 5.025,1.25 J4.4 ; Q1.8 5.405,-0.395 J4.5
LED_POWER: R17.1 U4.12 | length 3.2
  L1 w0.3: R17.1 R17.1@5.413,2.288 ; R17.1@5.4,2.275 5.806,1.869 cw(c5.336,1.4) 6,1.4 ccw(c6.664,1.4) 6.194,0.931 6.25,0.875 ccw(c7.155,1.78) 7.155,0.5 U4.12
MIC_OUT: C10.1 U2.4 | length 1.9
  L1 w0.3: C10.1 24,-2.293 ccw(c25.707,-2.293) U2.4 ccw(c25.707,-2.293) U2.4
MISO: J3.7 pad.TP@8.59,9.525 U4.11 | length 17
  L1 w0.2: pad.TP@8.59,9.525 cw(c8.59,8.744) 9.142,9.296 10.703,7.736 ; U4.11 cw(c10.318,2.15) 9.386,3.082 10.798,4.494 ccw(c10.517,4.775) 10.898,4.661 ccw(c10.517,4.775) 10.91,4.716 ; 10.703,7.735 cw(c10.192,7.225) 10.914,7.225 10.914,4.797 cw(c10.353,4.797) 10.914,4.785 cw(c10.126,4.799) 10.91,4.716 ; 10.914,4.775 cw(c10.517,4.775) 10.91,4.716
  L1 w0.3: U4.11 9,0.807 ccw(c10.707,0.807) v1(9.5,-0.4)
  L4 w0.3: v1(9.5,-0.4) cw(c8.896,-1.004) 9.75,-1.004 9.75,-1.3 ccw(c11.561,-1.3) 10.28,-2.58 ; 10.28,-2.58 10.476,-2.776 cw(c8.725,-4.525) 11.2,-4.525 J3.7
MOSI: J3.3 pad.TP@9.86,9.525 U4.10 | length 18.7
  L1 w0.2: U4.10 cw(c11.49,2.15) 10.295,3.345 11.1,4.15 ccw(c10.697,4.553) 11.259,4.461 ccw(c10.697,4.553) 11.267,4.553 11.267,7.325 ccw(c10.285,7.325) 10.979,8.019 10.133,8.865 ; pad.TP@9.86,9.525 ccw(c10.793,9.525) 10.133,8.865
  L1 w0.3: U4.10 9.798,2.148 9.798,0.568 ccw(c10.318,0.568) 9.95,0.2 10.403,-0.253 ccw(c11,0.345) v1(11,-0.5)
  L4 w0.3: v1(11,-0.5) ccw(c13.173,-0.5) 11.636,-2.036 13.317,-3.717 ccw(c14,-3.034) 14,-4 14.617,-4 cw(c14.617,-4.683) 15.1,-4.2 ; 15.1,-4.2 15.6,-4.7 J3.3
MPU_INT: R13.2 U4.29 U5.12 | length 31
  L1 w0.3: v1(0.75,4.75) R13.2@1.3,4.2 ; R13.2 R13.2@1.3,4.2 ; U5.12 3.137,6.23 2.598,5.691 2.591,5.691 1.3,4.4 R13.2@1.3,4.2 ; U4.29 13.8,-8.412 cw(c14.312,-8.412) 13.95,-8.05 ccw(c13.503,-7.603) 14.135,-7.603 14.135,-5.374 cw(c15.124,-5.374) 14.169,-5.118 cw(c15.124,-5.374) 14.425,-4.675 ccw(c14.003,-4.253) 14.6,-4.253 v1(14.6,-2.1)
  L3 w0.3: v1(0.75,4.75) ccw(c1.354,5.354) 1.354,4.5 5,4.5 ccw(c5,5.949) 6.024,4.924 6.549,5.449 cw(c8.116,3.883) 8.116,6.098 8.686,6.098 cw(c8.686,4.128) 10.079,5.521 14.097,1.503 14.425,1.175 ; 14.425,1.175 cw(c13.633,0.383) 14.753,0.383 14.753,-1.73 cw(c14.23,-1.73) v1(14.6,-2.1)
NetC8_1: C8.1 R4.2 | length 1.5
  L1 w0.3: C8.1 R4.2
NetC18_1: C18.1 U5.20 | length 2
  L1 w0.3: U5.20 9.462,6.738 C18.1
NetC19_1: C19.1 U5.10 | length 2
  L1 w0.3: C19.1 1.546,7.246 U5.10
NetR4_1: R4.1 U2.3 | length 2.2
  L1 w0.3: R4.1 ccw(c24.093,-3.707) R4.1 ccw(c24.093,-3.707) 24.093,-5.96 U2.3
NetR5_1: R5.1 U3.5 | length 1.8
  L1 w0.3: R5.1 ccw(c22.569,8.769) 21.82,6.68 ccw(c22.569,8.769) 22.569,6.55 U3.5
RESET: pad.TP@6.4,2.7 R10.2 U4.13 | length 6.8
  L1 w0.2: 4.643,2.165 4.643,2.862 ; 4.644,2.165 ccw(c6.255,2.225) R10.2@5.114,1.086 ; 4.647,2.862 cw(c5.118,2.8) 5.118,3.275 5.4,3.275 cw(c5.4,2.249) 6.126,2.974 pad.TP@6.4,2.7 ; R10.2@5.115,1.085 R10.2
  L1 w0.3: R10.2 6.112,0.087 ccw(c7.048,1.023) 7.048,-0.3 U4.13
RX: pad.TP@7.61,-10.135 U4.20 | length 5.6
  L1 w0.2: U4.20 8.2,-5.9 cw(c8.2,-6.2) 8.5,-6.2 8.5,-7.617 cw(c7.817,-7.617) 8.494,-7.706 cw(c7.817,-7.617) 8.3,-8.1 7.932,-8.468 ccw(c8.739,-9.275) 7.602,-9.173 ; 7.598,-9.173 7.598,-10.123 pad.TP@7.61,-10.135
SCL: R12.2 U4.18 U5.23 | length 24.7
  L1 w0.2: U5.23 8.075,8.25 cw(c8.075,5.895) 9.74,7.56 10.098,7.202 cw(c9.829,6.933) 10.21,6.933 10.21,4.98 9.177,3.948 9.17,3.948 9.061,3.839 ; v1(7.6,2.7) 7.6,2.798 8.238,3.437 cw(c8.814,2.861) 8.591,3.644 ; 9.061,3.838 cw(c8.591,4.309) 8.791,3.675 ; 8.591,3.644 ccw(c8.591,4.309) 8.791,3.675 ; 8.591,3.644 cw(c8.814,2.861) 8.791,3.675
  L1 w0.3: R12.2 R12.2@3.088,-6.213 ; R12.2@3.1,-6.225 3.524,-5.801 cw(c4.25,-6.526) 4.25,-5.5 ccw(c4.25,-3.689) 5.53,-4.97 5.65,-4.85 cw(c6.978,-6.178) 5.652,-4.848 cw(c6.978,-6.178) 6.978,-4.3 U4.18 U4.18@7.635,-4.3 ; U4.18@7.575,-4.325 cw(c7.635,-4.385) U4.18@7.635,-4.3 ; 8.541,-4.159 cw(c8.2,-3.817) 8.2,-4.3 U4.18@7.635,-4.3 ; 8.541,-4.159 v1(9,-3.7)
  L3 w0.3: v1@7.599,2.699 ccw(c8.211,2.089) 7.347,2.089 7.347,-1.1 ; v1(9,-3.7) 8.016,-2.716 ; 7.347,-1.1 ccw(c9.633,-1.1) 8.016,-2.716 ; 7.347,-1.1 ccw(c9.633,-1.1) 8.016,-2.716
SCLK: J3.5 pad.TP@11.7,3.8 U4.9 | length 11
  L1 w0.2: U4.9 10.6,2.591 cw(c11.539,2.591) 10.875,3.255 11.222,3.602 cw(c11.7,3.124) pad.TP@11.7,3.8
  L1 w0.3: v1(10.5,0.75) 10.6,0.85 U4.9
  L4 w0.3: v1(10.5,0.75) ccw(c10.989,0.261) 10.298,0.261 10.298,-0.568 ccw(c12.838,-0.568) 11.042,-2.364 13.204,-4.526 cw(c12.73,-5) J3.5 ccw(c12.917,-5) J3.5@13.259,-4.659
SD_SW: J3.11 R14.1 U4.27 | length 28.3
  L1 w0.3: U4.27@12.211,-8.513 cw(c13.476,-8.513) 12.414,-7.826 cw(c13.476,-8.513) 12.581,-7.619 ; 12.582,-7.618 12.851,-7.349 ccw(c12.001,-6.5) 13.202,-6.5 13.202,-3.947 ccw(c12.853,-3.947) 13.1,-3.7 cw(c13.583,-3.217) 12.9,-3.217 v1(12.9,-2.3)
  L3 w0.3: v1(5.5,-7) 6.756,-5.744 cw(c8.552,-7.54) 8.552,-5 10.251,-5 ccw(c10.251,-2.951) 11.7,-4.4 12.264,-3.836 ccw(c10.727,-2.3) v1(12.9,-2.3) 12.9,-1.552 ccw(c10.36,-1.552) 12.156,0.244 9.212,3.188 ccw(c8.7,2.676) 8.7,3.4 8.583,3.4 cw(c8.583,4.083) 8.1,3.6 cw(c8.824,4.324) 7.8,4.324 v1(7.8,4.7)
  L4 w0.3: v1(5.5,-7) R14.1 ; v1(7.8,4.7) 7.8,4.8 8.4,5.4 J3.11@8.4,5.5
SDA: R11.2 U4.19 U5.24 | length 24
  L1 w0.2: U5.24 8.175,8.75 cw(c8.175,6.299) 9.908,8.033 ; v1(8.1,1.7) ccw(c7.376,2.424) 8.4,2.424 8.4,2.675 cw(c8.933,2.675) 8.556,3.052 8.701,3.197 cw(c8.95,2.948) 8.95,3.3 ccw(c8.95,3.488) 8.982,3.303 ccw(c8.843,3.669) 9.12,3.392 10.562,4.834 10.562,7.177 ccw(c10.075,7.177) 10.419,7.521 9.908,8.032
  L1 w0.3: R11.2 ccw(c4.5,-5.153) 4.919,-6.221 ccw(c4.5,-5.153) 5.311,-5.964 5.802,-5.473 ; U4.19@6.625,-5.125 ccw(c6.625,-6.272) 5.814,-5.461 5.802,-5.473 ; v1@10.125,-3.6 9.369,-4.356 cw(c7.573,-2.56) 9.145,-4.555 cw(c7.573,-2.56) 7.573,-5.1 U4.19 7.127,-5.1 ccw(c7.127,-7.64) 5.802,-5.473
  L3 w0.3: v1(8.1,1.7) 8.1,-1.204 ccw(c9.668,-1.204) 8.557,-2.311 ccw(c9.668,-1.204) 8.559,-2.313 ccw(c8.992,-1.88) 8.992,-2.492 9.097,-2.492 cw(c9.097,-3.185) 9.587,-2.695 9.885,-2.993 cw(c9.367,-3.511) 10.1,-3.511 v1(10.1,-3.6)
SW: R15.1 SW1.2 U4.36 | length 11.3
  L1 w0.3: U4.36 17.7,-5.9 ccw(c17.7,-6.3) 17.3,-6.3 17.3,-7.205 ccw(c18.495,-7.205) 17.65,-8.05 18.317,-8.717 ccw(c19,-8.034) v1(19,-9)
  L4 w0.3: SW1.2 cw(c15.785,-9.625) SW1.2@15.23,-9.07 ; SW1.2@15.231,-9.069 cw(c16.606,-10.447) 16.606,-8.5 17.7,-8.5 ; R15.1 17.7,-8.5 ; v1@18.994,-8.994 ccw(c17.8,-10.19) 17.8,-8.5 17.7,-8.5 ; v1@18.995,-8.995 v1(19,-9)
TX: pad.TP@5.07,-10.135 U4.21 | length 4.3
  L1 w0.2: pad.TP@5.07,-10.135 5.07,-9.432 cw(c7.61,-9.432) 5.814,-7.636 6.641,-6.809 cw(c7.025,-7.193) U4.21@7.025,-6.65
XTAL1: C16.1 U4.17 X1.3 | length 7
  L1 w0.3: C16.1 1.5,-4.685 cw(c1.585,-4.685) X1.3@1.525,-4.625 ; X1.3@2.244,-4.106 2.25,-4.1 cw(c3.699,-5.549) 3.699,-3.5 U4.17
XTAL2: C11.1 U4.16 X1.1 | length 5.9
  L1 w0.3: C11.1 ccw(c4.571,-0.5) 2.802,-1.11 ccw(c4.571,-0.5) 3.248,-1.823 X1.1@3.95,-2.525 ; X1.1@3.95,-2.7 U4.16
pads on no net: J1.3 J2.ID U1.4 U4.1 U4.8 U4.22 U4.25 U4.26 U4.31 U4.32 U4.37 U5.2 U5.3 U5.4 U5.5 U5.6 U5.7 U5.14 U5.15 U5.16 U5.17 U5.19 U5.21 U5.22
copper on no net:
  other v1: 20,1.5

## Polygon pours and split planes (outlines as drawn)
+3.3V on L3 "NONET_L-01_P-001" (solid, remove dead copper, pour order 15): 0,13 0,-13 30,-13 30,13
GND on L1 "NONET_L-01_P-001" (solid, remove dead copper, pour order 14): 0,-13 0,13 30,13 30,-13
LED_GND on L4 "NONET_L-01_P-001" (solid, remove dead copper, pour order 16): 6.7,2 6.7,-5.5 1,-5.5 1,-3.5 4,-3.5 4,2
+BAT on L4 "NONET_L-01_P-001" (solid, remove dead copper, pour order 17): 4.5,3 4.5,7.5 25.5,7.5 26,7.5 26,3
GND on L4 "NONET_L-01_P-001" (solid, remove dead copper, pour order 18): 0,-13 0,13 30,13 30,-13
GND on L2 (GND) "NONET_L-01_P-001" (solid, remove dead copper, pour order 20): -0.1,13 -0.1,-13 29.9,-13 29.9,13

## Keep-outs
Keep-Out Layer:
  the board outline again, w0.1

## Silkscreen, mask and mechanical layers (free items; w line width, h text height)
Top Overlay:
  text "3.3V" at 7.9,11.5 h0.5
  text "GND" at 9.6,11.5 h0.5
  text "GND" at 29.4,8.3 h0.5 r90
  text "+BAT" at 28.2,7.7 h0.5 r90
  text "MISO" at 8.8,7.5 h0.5 r90
  text "MOSI" at 10.1,7.4 h0.5 r90
  text "SCLK" at 9.5,3.6 h0.5
  text "RESET" at 6.2,3.3 h0.5
  text ".ProjectRevision" at 29.3,-6.5 h2 r90
  text "TX" at 5.3,-9.5 h0.5 r90
  text "GND" at 6.6,-9.5 h0.5 r90
  text "RX" at 7.9,-9.5 h0.5 r90
  text "Arduhoop" at 18,-10.4 h3
Bottom Overlay:
  region: 2684 vertices and 8 holes, not listed, extent 22.767,-10.059 29.508,-3.749
  text "LEDS" at 3.8,8.6 h1
  text "BAT" at 28.9,8.6 h1
  text "+" at 22.6,5.2 h0.5 r180
  text "+" at 7.4,4.8 h0.5
  text "+" at 22.6,4 h0.5 r180
  text "+" at 7.4,3.5 h0.5
  text "D" at 7.4,2.2 h0.5
  text "-" at 22.6,1.5 h0.5 r180
  text "-" at 7.4,1 h0.5
  text "-" at 22.6,0.2 h0.5 r180
  text "-" at 7.4,-0.2 h0.5
Top Solder:
  region: 13.3,6.2 13.3,8.2 16.7,8.2 16.7,6.2
Mechanical 1:
  lines w0.2: 0,-11.985 ccw(c0.715,-11.985) 0.715,-12.7 2.3,-12.7 ccw(c2.3,-12) 3,-12 3,-11 11.25,-11 11.25,-12 13.1,-12 13.1,-10.65 16.9,-10.65 16.9,-12 18.75,-12 18.75,-11 27,-11 27,-12 ccw(c27.7,-12) 27.7,-12.7 29.285,-12.7 ccw(c29.285,-11.985) 30,-11.985 30,-11 30,11 30,11.985 ccw(c29.285,11.985) 29.285,12.7 27.7,12.7 ccw(c27.7,12) 27,12 27,11 22.6,11 22.6,12.5 7.4,12.5 7.4,11 3,11 3,12 ccw(c2.3,12) 2.3,12.7 0.715,12.7 ccw(c0.715,11.985) 0,11.985 0,11 0,-11 0,-11.985
Mechanical 3:
  lines w0.1: -10.08,-12.7 50.88,-12.7 ; -10.08,-11.112 50.88,-11.112 ; -10.08,11.112 50.88,11.112 ; -10.08,12.7 50.88,12.7

## Dimensions
50.88,-12.7 to 50.88,12.7 on Mechanical 3
0,-11 to 30,-11 on Mechanical 3
-10.08,-12.7 to -10.08,12.7 on Mechanical 3
-10.08,12.7 to -10.08,-12.7 on Mechanical 3
-10.08,11.112 to -10.08,-11.112 on Mechanical 3

## Text inside footprints (layer, text, board x,y; h text height)
J3: Bottom Overlay "Keep Out" at 10.4,2.7 h1 r180
U5: Top Overlay "X" at 5.4,6.094 h0.26 r90; Top Overlay "Y" at 6.91,7.5 h0.26 r90; Top Overlay "Z" at 5.1,7.7 h0.26 r90